# EAGLE board relayboard (EAGLE 5.11)
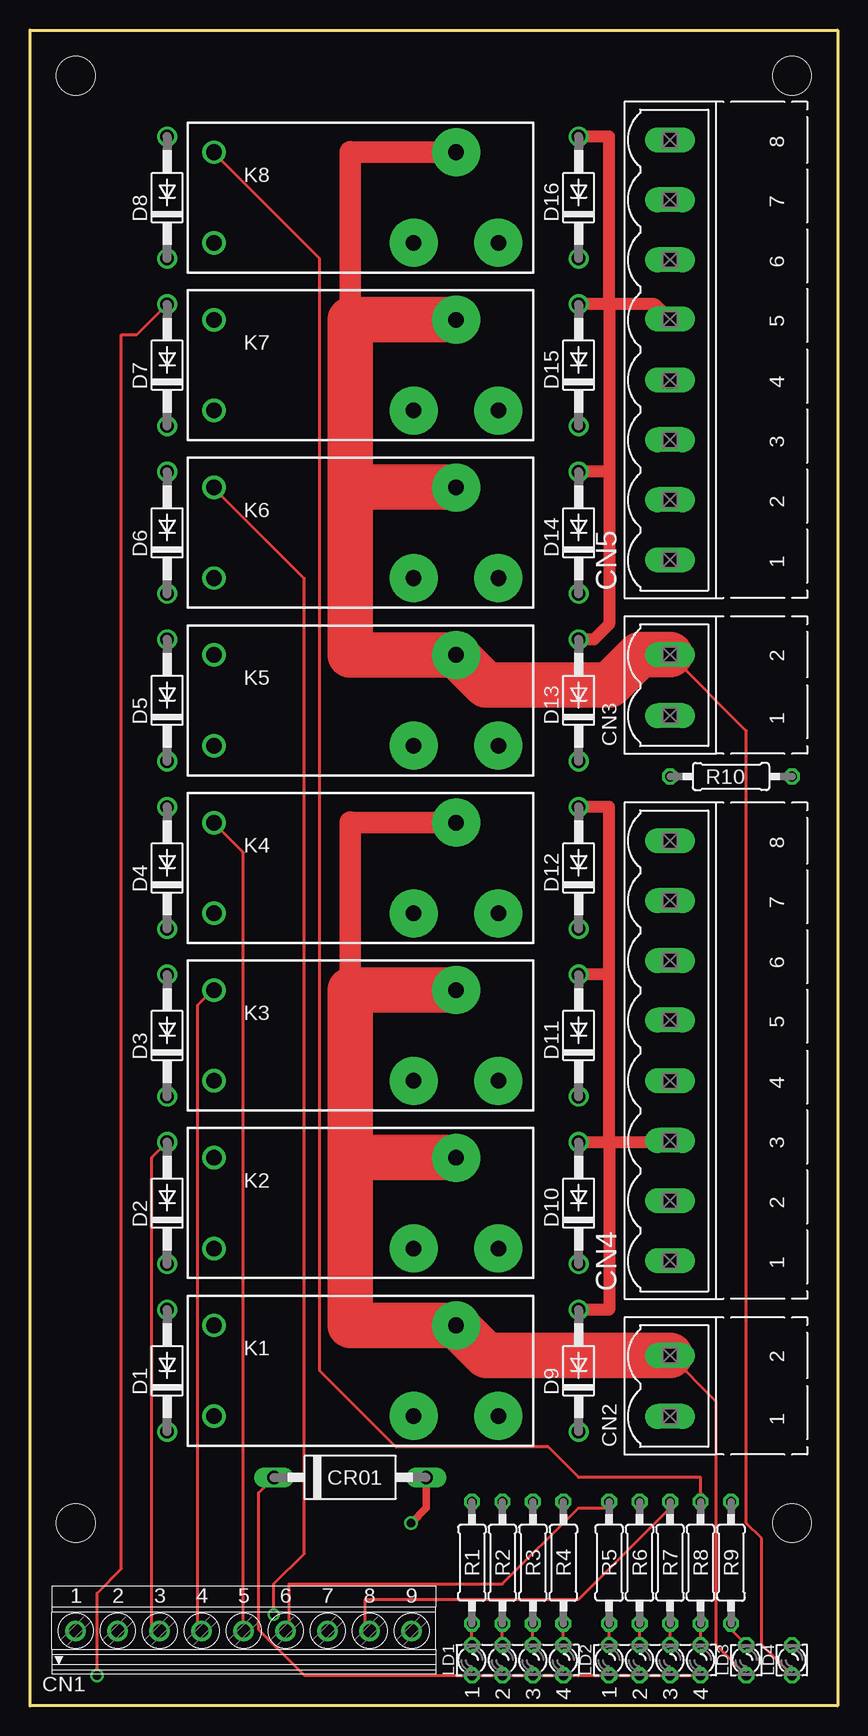
[diagram p0: board, top side]
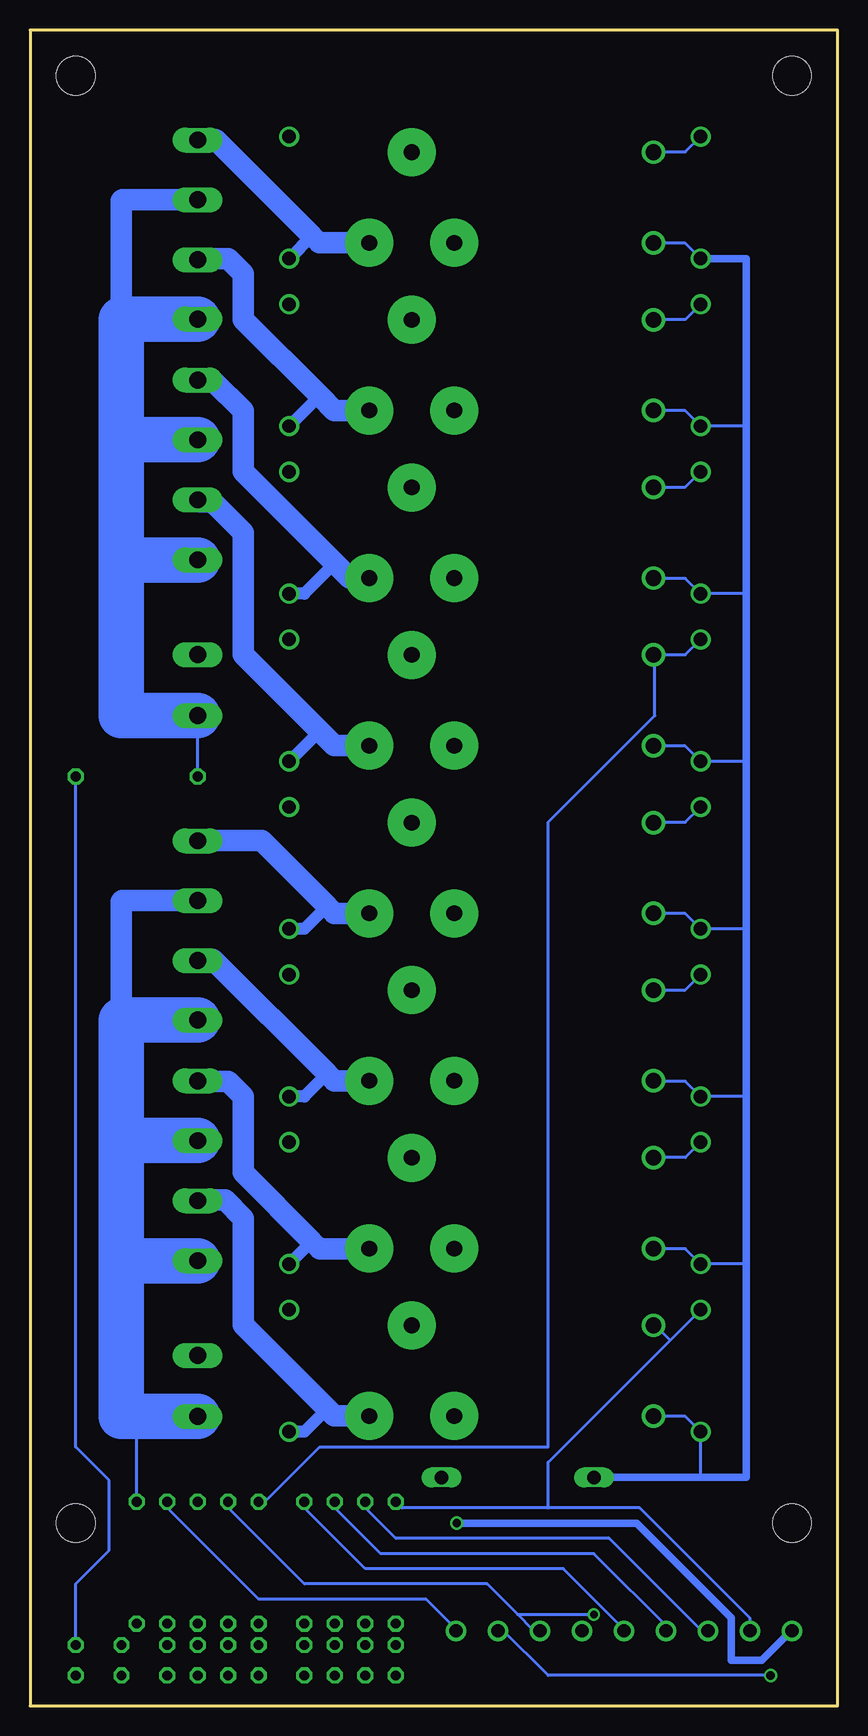
[diagram p1: board, bottom side, seen from below]

Size 67.31 x 139.7 mm. Coordinates in mm from the lower left corner, seen from the top.
Outline: 0,0 0,139.7 67.31,139.7 67.31,0 0,0
Copper layers (1*16): Top 0.035mm / dielectric 1.5mm / Bottom 0.035mm
Design rules "default": minimum track width 10mil, minimum drill 24mil, track to track 8mil, track to pad 8mil, pad to pad 8mil, via to via 8mil, smd to smd 8mil, copper to edge 40mil, drill to drill 8mil, minimum pad ring 10mil, minimum via ring 8mil, stop-mask expansion 4mil, vias tented up to drill 0mil, thermal gap 10mil
Holes 3.2 mm at 3.81,135.89 63.5,135.89 3.81,15.24 63.5,15.24

## Footprints (pad centres in the part's own frame; a part is rotated, then mirrored left to right if it is on the bottom)
1751316 = drill 1.1 pad 1.7 round: 1 -13.973,-0.1; 2 -10.473,-0.1; 3 -6.973,-0.1; 4 -3.473,-0.1; 5 0.028,-0.1; 6 3.527,-0.1; 7 7.027,-0.1; 8 10.527,-0.1; 9 14.027,-0.1
MSTBV2R = drill 1.397 long: 1 -2.54,0; 2 2.54,0
MSTBV8R = drill 1.397 long: 1 -17.5,0; 2 -12.496,0; 3 -7.492,0; 4 -2.514,0; 5 2.566,0; 6 7.519,0; 7 12.523,0; 8 17.501,0
DO15-12 = drill 1.118 long: A 6.35,0; C -6.35,0
DO41-10 = drill 1.118 round: A 5.08,0; C -5.08,0
RT-C/O12A3.5 = drill 1.3 pad 4 round: 11 7.56,3.78; 12 4.02,-3.78; 14 11.1,-3.78 | drill 1.3 round: A1 -12.6,-3.78; A2 -12.6,3.78
LZR184 = drill 0.813 octagon: A1 -1.27,3.81; A2 -1.27,1.27; A3 -1.27,-1.27; A4 -1.27,-3.81; K1 1.27,3.81; K2 1.27,1.27; K3 1.27,-1.27; K4 1.27,-3.81
LZR181 = drill 0.813 octagon: A -1.27,0; K 1.27,0
0207/10 = drill 0.813 octagon: 1 -5.08,0; 2 5.08,0

## Placement (x,y rotation side)
CN1  RELAY SIGNAL IN  [1751316]  17.78,6.35 0 top
CN2  1-4 PWR  [MSTBV2R]  53.34,26.67 90 top
CN3  6-8 PWR  [MSTBV2R]  53.34,85.09 90 top
CN4  SOLENOIDS 1-4  [MSTBV8R]  53.34,54.61 90 top
CN5  SOLENOIDS 5-8  [MSTBV8R]  53.34,113.03 90 top
CR01  [DO15-12]  26.67,19.05 0 top
D1  [DO41-10]  11.43,27.94 90 top
D2  [DO41-10]  11.43,41.91 90 top
D3  [DO41-10]  11.43,55.88 90 top
D4  [DO41-10]  11.43,69.85 90 top
D5  [DO41-10]  11.43,83.82 90 top
D6  [DO41-10]  11.43,97.79 90 top
D7  [DO41-10]  11.43,111.76 90 top
D8  [DO41-10]  11.43,125.73 90 top
D9  [DO41-10]  45.72,27.94 90 top
D10  [DO41-10]  45.72,41.91 90 top
D11  [DO41-10]  45.72,55.88 90 top
D12  [DO41-10]  45.72,69.85 90 top
D13  [DO41-10]  45.72,83.82 90 top
D14  [DO41-10]  45.72,97.79 90 top
D15  [DO41-10]  45.72,111.76 90 top
D16  [DO41-10]  45.72,125.73 90 top
K1  [RT-C/O12A3.5]  27.94,27.94 0 top
K2  [RT-C/O12A3.5]  27.94,41.91 0 top
K3  [RT-C/O12A3.5]  27.94,55.88 0 top
K4  [RT-C/O12A3.5]  27.94,69.85 0 top
K5  [RT-C/O12A3.5]  27.94,83.82 0 top
K6  [RT-C/O12A3.5]  27.94,97.79 0 top
K7  [RT-C/O12A3.5]  27.94,111.76 0 top
K8  [RT-C/O12A3.5]  27.94,125.73 0 top
LD1  [LZR184]  40.64,3.81 90 top
LD2  [LZR184]  52.07,3.81 90 top
LD3  [LZR181]  59.69,3.81 90 top
LD4  [LZR181]  63.5,3.81 90 top
R1  [0207/10]  36.83,11.94 90 top
R2  [0207/10]  39.37,11.94 90 top
R3  [0207/10]  41.91,11.94 90 top
R4  [0207/10]  44.45,11.94 90 top
R5  [0207/10]  48.26,11.94 90 top
R6  [0207/10]  50.8,11.94 90 top
R7  [0207/10]  53.34,11.94 90 top
R8  [0207/10]  55.88,11.94 90 top
R9  [0207/10]  58.42,11.94 90 top
R10  [0207/10]  58.42,77.47 180 top

## Library data of the parts
CN1 = con-phoenix-350
CN2-CN5 = con-phoenix-500
CR01 D1-D16 = diode
K1-K8 = relay
LD1-LD4 = led
R1-R10 = resistor

## Nets
FUCKER: CR01.C D1.C D2.C D3.C D4.C D5.C D6.C D7.C D8.C K1.A1 K2.A1 K3.A1 K4.A1 K5.A1 K6.A1 K7.A1 K8.A1 LD1.A1 LD1.A2 LD1.A3 LD1.A4 LD2.A1 LD2.A2 LD2.A3 LD2.A4
S$1: LD1.K1 R1.1
S$2: CN1.2 D1.A K1.A2 R1.2
S$3: CN1.3 D2.A K2.A2 R2.2
S$4: CN1.4 D3.A K3.A2 R3.2
S$5: CN1.5 D4.A K4.A2 R4.2
S$6: CN1.6 D5.A K5.A2 R5.2
S$7: CN1.7 D6.A K6.A2 R6.2
S$8: CN1.8 D7.A K7.A2 R7.2
S$9: CN1.9 D8.A K8.A2 R8.2
S$10: CN4.4 D10.C K2.14
S$11: CN3.2 K5.11 K6.11 K7.11 K8.11 LD4.A
S$13: CN4.2 D9.C K1.14
S$14: LD1.K2 R2.1
S$15: LD1.K3 R3.1
S$16: CN4.6 D11.C K3.14
S$17: CN4.8 D12.C K4.14
S$18: CN5.2 D13.C K5.14
S$19: CN5.4 D14.C K6.14
S$20: CN5.6 D15.C K7.14
S$21: CN5.8 D16.C K8.14
S$22: CN3.1 CN5.1 CN5.3 CN5.5 CN5.7 D13.A D14.A D15.A D16.A R10.2
S$23: CN2.1 CN4.1 CN4.3 CN4.5 CN4.7 D9.A D10.A D11.A D12.A R9.2
S$24: LD1.K4 R4.1
S$25: LD2.K1 R5.1
S$26: LD2.K2 R6.1
S$27: LD2.K3 R7.1
S$28: LD2.K4 R8.1
S$29: LD3.K R9.1
S$30: LD4.K R10.1
S$31: CN1.1 CR01.A
S$32: CN2.2 K1.11 K2.11 K3.11 K4.11 LD3.A

## Tracks (layer width: path | path; a pad name or v marks a point on that pad's centre or on a via)
FUCKER
  Top 0.254: LD2.A4 LD2.A3 LD2.A2 LD2.A1 LD1.A4 LD1.A3 LD1.A2 LD1.A1 22.86,2.54 19.05,6.35 19.05,17.78 CR01.C
  Bottom 0.254: D8.C 12.7,121.92 15.24,121.92 K8.A1 | K7.A1 15.24,107.95 12.7,107.95 D7.C 7.62,106.68 | K6.A1 15.24,93.98 12.7,93.98 D6.C 7.62,92.71 | K5.A1 15.24,80.01 12.7,80.01 D5.C 7.62,78.74 | K4.A1 15.24,66.04 12.7,66.04 D4.C 7.62,64.77 | K3.A1 15.24,52.07 12.7,52.07 D3.C 7.62,50.8 | K2.A1 15.24,38.1 12.7,38.1 D2.C 7.62,36.83 | K1.A1 15.24,24.13 12.7,24.13 D1.C 11.43,19.05
  Bottom 0.61: D8.C 7.62,120.65 7.62,106.68 7.62,92.71 7.62,78.74 7.62,64.77 7.62,50.8 7.62,36.83 7.62,19.05 11.43,19.05 CR01.C
S$1
  Top 0.254: LD1.K1 R1.1
S$2
  Bottom 0.254: 13.97,30.48 D1.A | 13.97,30.48 24.13,20.32 24.13,16.51 | 36.83,16.51 R1.2 36.32,16.51 24.13,16.51 | 13.97,30.48 15.24,31.75 K1.A2 | CN1.2 7.31,7.31 16.51,16.51 24.13,16.51
S$3
  Top 0.254: D2.A 10.16,45.72 10.16,6.35 CN1.3
  Bottom 0.254: D2.A 12.7,45.72 15.24,45.72 K2.A2 | R2.2 39.37,16.51 36.83,13.97 19.05,13.97 11.43,6.35 CN1.3
S$4
  Top 0.254: K3.A2 15.24,59.69 13.97,58.42 13.97,6.35 CN1.4
  Bottom 0.254: D3.A 12.7,59.69 15.24,59.69 K3.A2 | R3.2 41.91,16.51 38.1,12.7 20.32,12.7 13.97,6.35 CN1.4
S$5
  Top 0.254: K4.A2 15.24,73.66 17.78,71.12 17.78,6.35 CN1.5
  Bottom 0.254: D4.A 12.7,73.66 15.24,73.66 K4.A2 | R4.2 44.45,16.51 39.37,11.43 22.86,11.43 17.78,6.35 CN1.5
S$6
  Top 0.254: R5.2 48.26,16.51 45.72,16.51 39.37,10.16 21.59,10.16 21.59,6.35 CN1.6
  Bottom 0.254: D5.A 12.7,87.63 15.24,87.63 | 15.24,87.63 15.24,82.55 24.13,73.66 24.13,21.59 43.18,21.59 48.26,16.51 R5.2 | 15.24,87.63 K5.A2
S$7  (via drill 0.61)
  Top 0.254: v20.32,7.62 20.32,10.16 22.86,12.7 22.86,93.98 15.24,101.6 K6.A2
  Bottom 0.254: D6.A 12.7,101.6 15.24,101.6 K6.A2 | 26.67,7.62 25.4,6.35 CN1.7 | 26.67,7.62 29.21,10.16 44.45,10.16 50.8,16.51 R6.2 | 26.67,7.62 v20.32,7.62
S$8  (via drill 0.7)
  Top 0.254: R7.2 53.34,16.51 45.72,8.89 27.94,8.89 27.94,6.35 CN1.8 | v5.59,2.54 5.59,9.4 7.62,11.43 7.62,114.3 8.89,114.3 D7.A
  Bottom 0.254: D7.A 12.7,115.57 15.24,115.57 K7.A2 | CN1.8 27.94,6.35 24.13,2.54 v5.59,2.54
S$9
  Top 0.254: K8.A2 15.24,129.54 24.13,120.65 24.13,27.94 30.48,21.59 43.18,21.59 45.72,19.05 55.88,19.05 R8.2 55.88,16.51
  Bottom 0.254: D8.A 12.7,129.54 15.24,129.54 K8.A2 | R8.2 55.88,16.51 48.26,8.89 34.29,8.89 31.75,6.35 CN1.9
S$10
  Bottom 1.016: 43.81,38.73 D10.C
  Bottom 1.778: K2.14 39.34,38.13 39.37,38.1 43.18,38.1 43.81,38.73 49.53,44.45 49.53,50.8 50.8,52.07 53.31,52.07 CN4.4
S$11
  Top 0.254: LD4.A 60.96,5.08 60.96,13.97 59.69,15.24 59.69,81.28 CN3.2
  Top 1.778: K8.11 26.7,129.51 26.67,129.54 26.67,115.57
  Top 3.81: CN3.2 50.8,87.63 48.26,85.09 38.01,85.09 K5.11 26.7,87.6 26.67,87.63 26.67,101.6 | 26.67,101.6 35.47,101.6 K6.11 35.53,101.57 35.56,101.6 | K7.11 26.7,115.54 26.67,115.57 26.67,101.6
S$13
  Bottom 1.016: D9.C 44.45,22.86 42.55,24.77
  Bottom 1.778: K1.14 41.94,24.16 42.55,24.77 49.53,31.75 49.53,40.64 51.05,42.16 53.29,42.16 CN4.2
S$14
  Top 0.254: LD1.K2 R2.1
S$15
  Top 0.254: LD1.K3 R3.1
S$16
  Bottom 1.016: D11.C 44.45,50.8 42.55,52.7
  Bottom 1.778: K3.14 41.94,52.1 42.55,52.7 52.07,62.23 53.24,62.23 CN4.6
S$17
  Bottom 1.016: D12.C 44.45,64.77 42.55,66.67
  Bottom 1.778: K4.14 41.94,66.07 42.55,66.67 48.01,72.14 53.31,72.14 CN4.8
S$18
  Bottom 1.016: 43.18,81.28 D13.C
  Bottom 1.778: K5.14 41.94,80.04 43.18,81.28 49.53,87.63 49.53,97.79 52.07,100.33 53.14,100.33 CN5.2
S$19
  Bottom 1.016: D14.C 44.45,92.71 41.91,95.25
  Bottom 1.778: K6.14 40.67,94.01 41.91,95.25 49.53,102.87 49.53,107.95 52.07,110.49 53.31,110.49 CN5.4
S$20
  Bottom 1.016: 43.18,109.22 D15.C
  Bottom 1.778: K7.14 41.94,107.98 43.18,109.22 49.53,115.57 49.53,119.38 50.8,120.65 53.24,120.65 CN5.6
S$21
  Bottom 1.016: 43.81,122.56 D16.C
  Bottom 1.778: K8.14 43.21,121.95 43.81,122.56 51.82,130.56 53.31,130.56 CN5.8
S$22
  Top 1.016: D13.A 46.99,88.9 48.26,90.17 48.26,102.87 | 48.26,102.87 D14.A | 48.26,116.84 D15.A | 48.26,116.84 48.26,102.87 | D16.A 48.26,130.81 48.26,116.84 | 48.26,116.84 52.1,116.84 CN5.5
  Bottom 0.254: R10.2 CN3.1
  Bottom 1.778: CN5.7 59.61,125.55 59.69,125.48 59.69,115.57
  Bottom 3.81: CN3.1 59.69,82.55 59.69,95.5 | 59.69,95.5 53.37,95.5 CN5.1 | CN5.3 59.56,105.54 59.69,105.41 | 59.69,95.5 59.69,105.41 | CN5.5 59.66,115.6 59.69,115.57 59.69,105.41
S$23
  Top 1.016: D12.A 48.26,74.93 48.26,60.96 | 48.26,60.96 D11.A | 48.26,46.99 48.26,60.96 | 48.26,46.99 D10.A | D9.A 48.26,33.02 48.26,46.99 | 48.26,46.99 53.21,46.99 CN4.3
  Bottom 0.254: 58.42,16.51 R9.2 58.42,22.86 59.69,24.13
  Bottom 1.778: CN4.7 59.61,67.13 59.69,67.06 59.69,55.88
  Bottom 3.81: CN2.1 59.69,24.13 59.69,37.08 | 59.69,37.08 53.37,37.08 CN4.1 | 59.56,47.12 CN4.3 | 59.56,47.12 59.69,46.99 59.69,37.08 | CN4.5 59.66,57.18 59.69,57.15 59.69,55.88 59.69,47.24 59.56,47.12
S$24
  Top 0.254: LD1.K4 R4.1
S$25
  Top 0.254: LD2.K1 R5.1
S$26
  Top 0.254: LD2.K2 R6.1
S$27
  Top 0.254: LD2.K3 R7.1
S$28
  Top 0.254: LD2.K4 R8.1
S$29
  Top 0.254: LD3.K 58.42,6.35 R9.1
S$30
  Bottom 0.254: R10.1 63.5,21.59 60.71,18.8 60.71,12.95 63.5,10.16 LD4.K
S$31  (via drill 0.7)
  Top 0.61: CR01.A 33.02,16.51 v31.75,15.24
  Bottom 0.254: CN1.1 3.81,6.35
  Bottom 0.61: 3.81,6.35 6.35,3.81 8.89,3.81 8.89,7.37 16.76,15.24 v31.75,15.24
S$32
  Top 0.254: LD3.A 57.15,5.08 57.15,25.4 CN2.2
  Top 1.778: K4.11 26.7,73.63 26.67,73.66 26.67,58.42
  Top 3.81: CN2.2 38.01,29.21 K1.11 26.7,31.72 26.67,31.75 26.67,45.72 | 26.67,45.72 35.47,45.72 K2.11 | K3.11 26.7,59.66 26.67,59.69 26.67,58.42 26.67,45.72